# Altium PCB PCB_Toto.PcbDoc
Units mm, origin at the board's own origin, x right, y up, seen from the top; angles counter-clockwise.
Board outline 56.42 x 35 mm, 2 copper layers (Top Layer, Bottom Layer); 14 components, 13 nets, 56 pads, 4 vias.
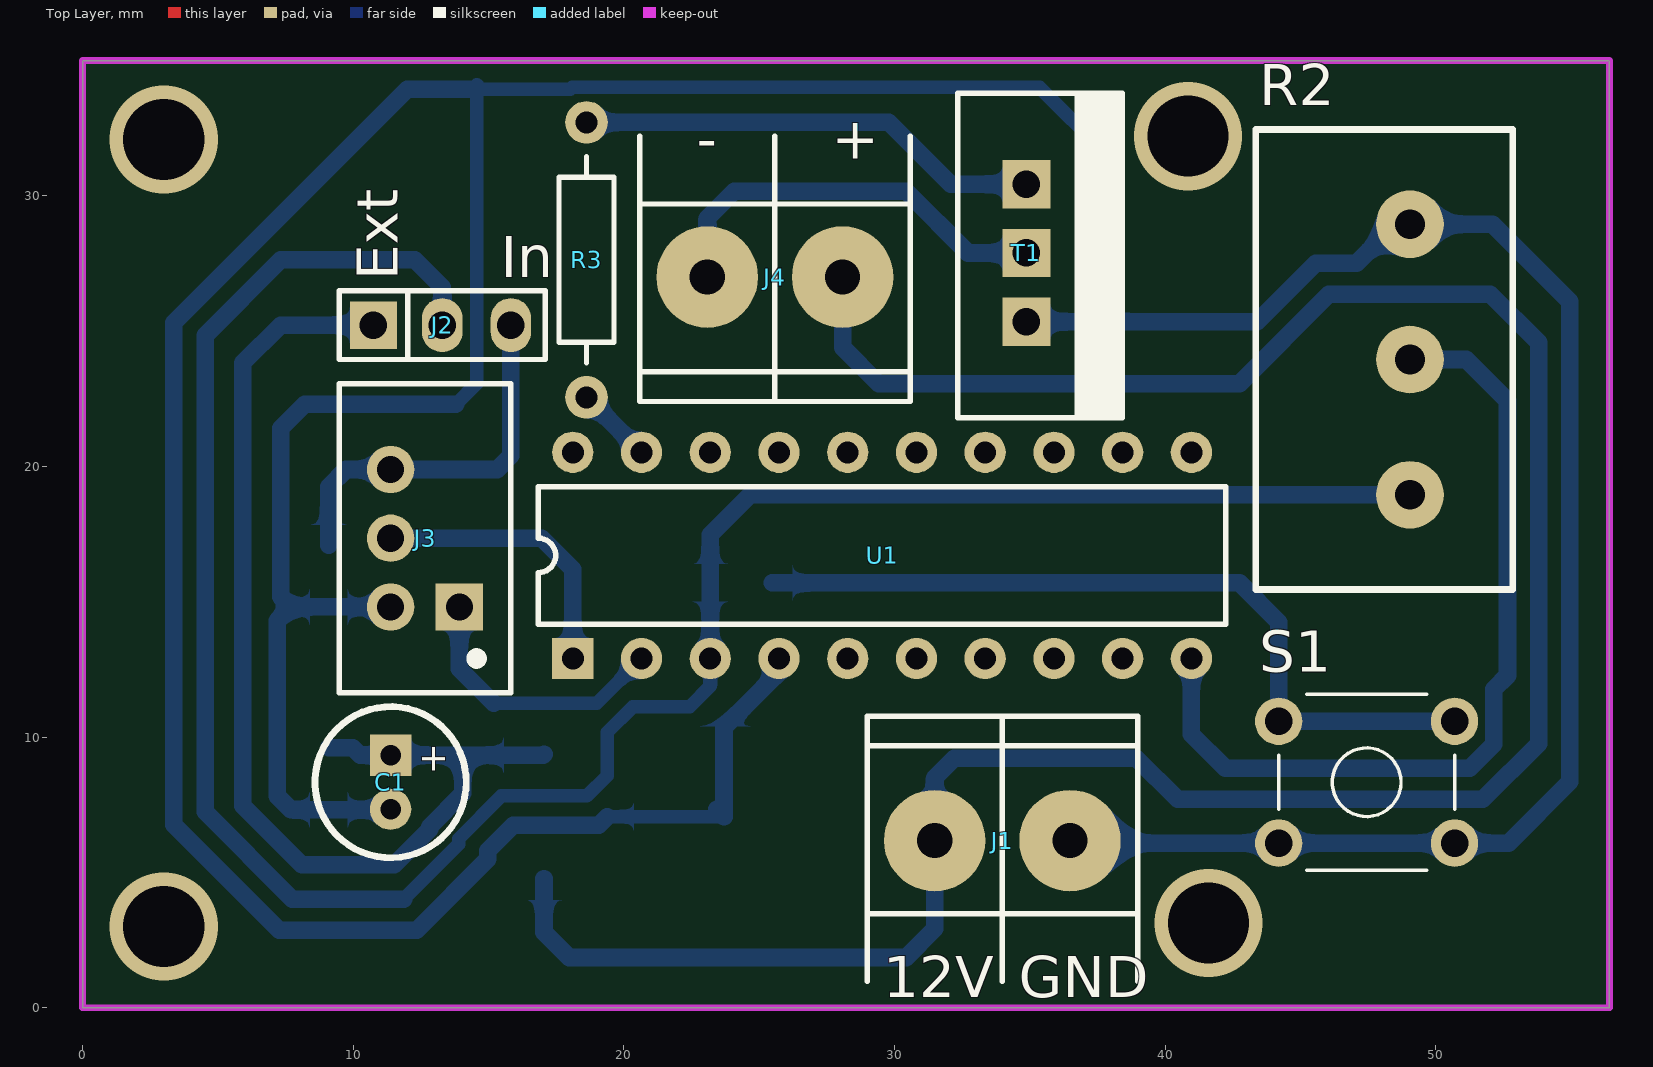
[diagram p0: Top Layer view]
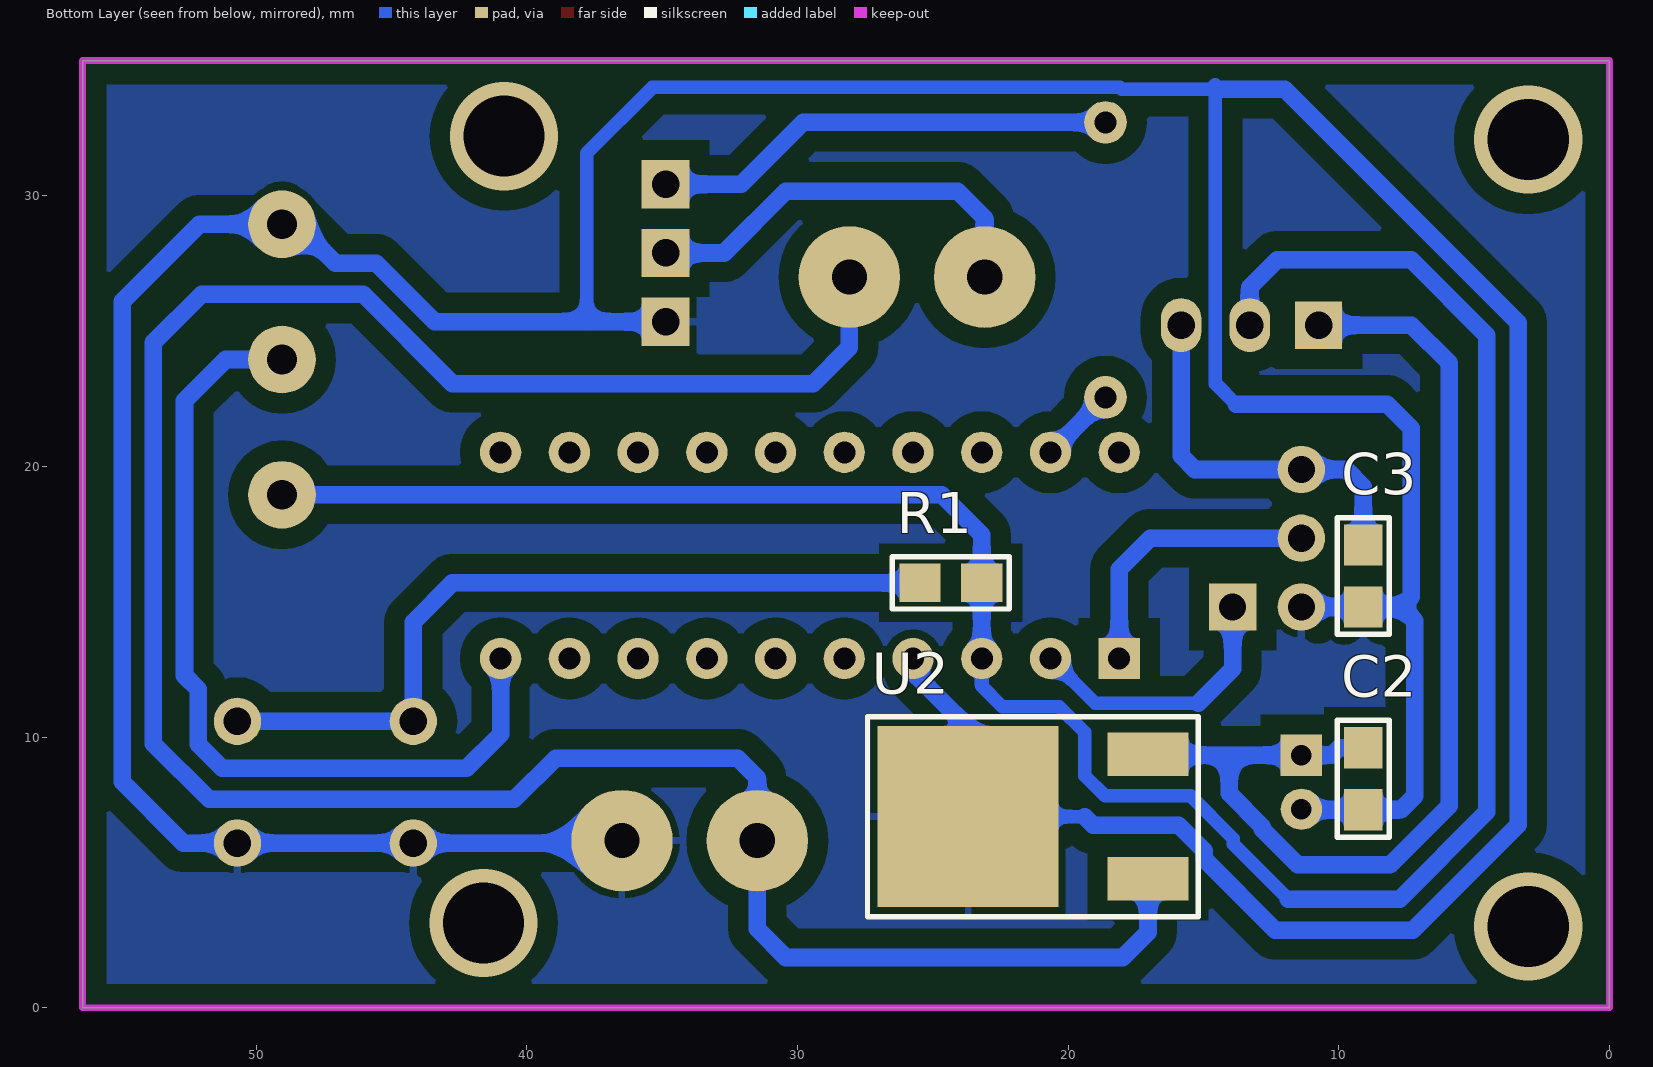
[diagram p1: Bottom Layer view, seen from below]
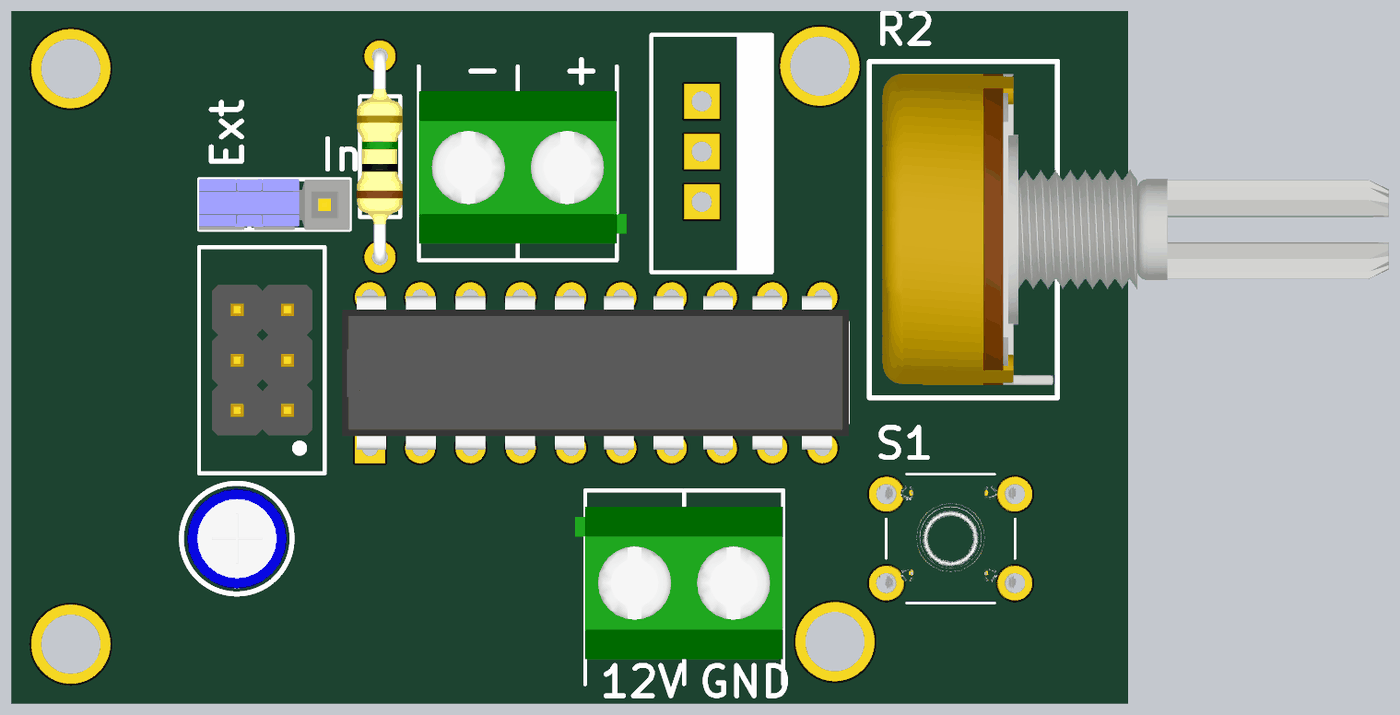
[diagram p2: 3D render of the assembled board from above, using the file's embedded part models]
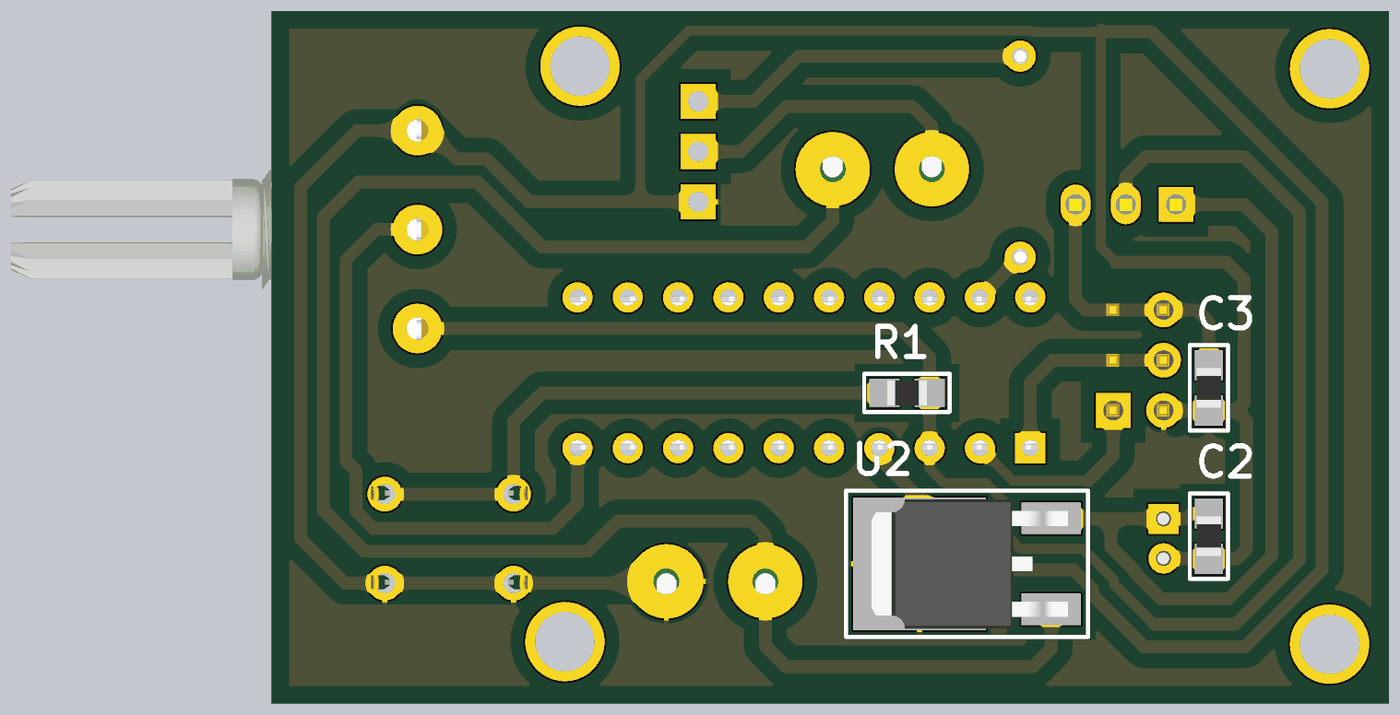
[diagram p3: 3D render of the assembled board from below, using the file's embedded part models]

## Layer stack, top to bottom
Top Solder: solder mask 0.0102, Solder Resist, Dk 3.5
Top Layer: signal copper 0.0356
Dielectric 1: dielectric 0.32, FR-4, Dk 4.8
Bottom Layer: signal copper 0.0356
Bottom Solder: solder mask 0.0102, Solder Resist, Dk 3.5

## Board outline
0,0 56.42,0 56.42,35 0,35

## Design rules (kind name [scope] priority, off if disabled: settings)
Clearance [InPolygon] p1: gap=0.75 ignorepadtopadclearanceinfootprint=FALSE
Clearance Clearance_1 [All] p2: gap=0.254 ignorepadtopadclearanceinfootprint=FALSE except(0: Arc-Hole Track-Hole SMDPad-Hole THPad-Hole Via-Hole Fill-Hole Poly-Hole Region-Hole Text-Hole; 0.5: Arc-Arc Arc-Track Track-Track)
PolygonConnect [All] p1: connectstyle=Relief reliefconductorwidth=0.254 reliefentries=4 polygonreliefangle="90 Angle" airgapwidth=0.254
RoutingVias [All] p1: holewidth=0.711 width=1.27 viastyle="Through Hole" minholewidth=0.711 minwidth=1.27 maxholewidth=0.711 maxwidth=1.27
SolderMaskExpansion [All] p1: expansion=0.102
Width [All] p1: maxlimit=0.8 minlimit=0.5 preferedwidth=0.65
30 further rules are at their usual default settings.

## Components (designator, comment, footprint, x,y, rotation, side; value= is the part's Value field where it differs from the comment)
C1 "10uF" CAP100RP 11.382,8.334 r270 top
C2 "100nF" 0805 9.096,8.461 r270 bottom
C3 "100nF" 0805 9.096,15.954 r270 bottom
J1 "Fuente Externa" BORNERA2 33.988,6.175 r270 top
J2 "JUMPER" JUMPER3 13.287,25.225 r0 top
J3 "CON3*2" SIP3*2 13.922,14.811 r90 top
J4 "BORNERA 2" BORNERA2 25.583,27.003 r90 top
R1 "10K" 0805 24.336,15.7 r180 bottom
R2 "25K" POTENCIOMETRO 49.05,23.955 r90 top
R3 "1K" RES400 18.621,22.558 r90 top
S1 "TACT SWITCH" TACTSWITCH 47.45,8.334 r90 top
T1 "TRANSISTOR NPN" "TO-220 V" 34.877,27.892 r270 top
U1 "MC9S08SH8" DIP20 18.113,12.906 r90 top
U2 "78XX" DPAK 17.051,4.764 r90 bottom

## Footprints (in the part's own frame and the unit in brackets; to place one, negate y for a bottom-side part, rotate by r counter-clockwise, add the part's x,y. Pads: shape width x height; smd on the part's side, far side on the other; paste and mask are expansions set on the pad)
0805 [mil] "Pasivo 0805"
  rect 60x56 smd: 1(-45,0) 2(45,0)
  silkscreen extent -85,-38 85,38, body extent -40,-25 39,25, height 15
BORNERA2 [mm] "Bornera con Tornillos 5mm separación"
  round 3.75 hole 1.3: 1(0,2.5) 2(0,-2.5)
  silkscreen extent -4.6,-5 5.2,5, body extent -3.76,-5.5 3.94,5, height 10
CAP100RP [mil] "Body diameter 5mm"
  rect 60x60 hole 30: 1(-39.37,0)
  round 60 hole 30: 2(39.37,0)
  silkscreen extent -110,-110 110,110, body extent -99,-99 99,100, height 454
DIP20 [mil]
  rect 60x60 hole 32: 1(0,0)
  round 60 hole 32: 2(0,-100) 3(0,-200) 4(0,-300) 5(0,-400) 6(0,-500) 7(0,-600) 8(0,-700) 9(0,-800) 10(0,-900) 11(300,-900) 12(300,-800) 13(300,-700) 14(300,-600) 15(300,-500) 16(300,-400) 17(300,-300) 18(300,-200) 19(300,-100) 20(300,0)
  silkscreen extent 50,-950 250,50, body extent -3,-953 303,55, height 177
DPAK [mm]
  rect 1.6x3 smd: 1(0,0) 3(4.6,0)
  rect 6.7x6.7 smd: 2(2.3,6.65)
  silkscreen extent -1.4,-1.85 6,10.36, body extent -0.98,-0.85 5.56,9.08, height 2.36
JUMPER3 [mm]
  rect 1.75x1.75 hole 1.016: 1(-2.54,0)
  oval 1.5x2 hole 1.016: 2(0,0) 3(2.54,0)
  silkscreen extent -3.81,-1.27 3.81,1.27, body extent -3.81,-1.3 3.81,1.27, height 16.15
POTENCIOMETRO [mm]
  round 2.5 hole 1.1: 1(-5,0) 2(0,0) 3(5,0)
  silkscreen extent -8.5,-3.8 8.5,5.7, body extent -7.87,-20.53 7.87,5.03, height 20.12
RES400 [mil]
  round 62 hole 32: 1(0,0) 2(400,0)
  silkscreen extent 50,-40 350,40, body extent -12,-45 412,46, height 96
SIP3*2 [mm]
  rect 1.75x1.75 hole 1: 1(0,0)
  round 1.75 hole 1: 2(0,2.54) 4(2.54,2.54) 6(5.08,2.54)
  round 0 all layers, no hole: 3(2.54,0) 5(5.08,0)
  silkscreen extent -3.18,-1.91 8.25,4.45, body extent -1.26,-1.3 6.36,3.78, height 10.1
TACTSWITCH [mm]
  round 1.75 hole 1.016: 1(-2.25,-3.25) 2(-2.25,3.25) 3(2.25,-3.25) 4(2.25,3.25)
  silkscreen extent -3.25,-3.25 3.25,3.25, body extent -3.05,-3.95 3.15,3.95, height 7
"TO-220 V" [mil]
  rect 70x70 hole 40: 1(-100,0) 2(0,0) 3(100,0)
  silkscreen extent -232,-100 240,139, body extent -197,-79 197,118, height 709

## Part data
C1: library part CAPPOL
C2 C3: library part CAP
J1: library part "BORNERA 2"
J2: library part JUMPER3
J3: library part PIN3*2
R1 R3: library part RES
R2: library part POTENCIOMETRO
U1: "IC MCU 8BIT 8K FLASH 20-DIP"
U2: "REGULDOR POSITIVO"

## Via types
v1: diameter 4, hole 3, Top Layer to Bottom Layer, 4 vias

## Nets (pads, with @x,y where several pads share a name; then routed paths per layer and width w, separated by ;. In a path a pad name is that pad's centre, name@x,y a point inside that pad or via, vN(x,y) a via of type N, cw(c..) or ccw(c..) an arc to the next point about the centre after c; other vN are vias at no path point)
5V: C1.1 C2.1 J2.1 U2.3 | length 41.4
  Bottom Layer w0.65: C2.1 9.985,9.604 10.255,9.334 C1.1 14.049,9.334 ; J2.1 7.318,25.225 5.921,23.828 5.921,7.47 8.105,5.286 11.509,5.286 12.822,6.599 12.822,6.694 14.049,7.921 14.049,9.334 ; U2.3 17.021,9.334 14.049,9.334
12V: J1.2 J4.2 U2.1 | length 92.7
  Bottom Layer w0.65: U2.1 17.051,2.792 17.986,1.857 30.432,1.857 31.488,2.913 J1.2 31.488,8.501 32.21,9.223 38.941,9.223 40.465,7.699 51.743,7.699 53.807,9.763 53.807,24.583 52.022,26.368 46.053,26.368 42.751,23.066 29.416,23.066 28.083,24.399 J4.2
A4: J3.1 U1.2 | length 10.2
  Bottom Layer w0.5: 15.192,11.255 19.002,11.255 U1.2
  Bottom Layer w0.65: J3.1 13.922,12.525 15.192,11.255
A5: J3.4 U1.1 | length 10.5
  Bottom Layer w0.65: J3.4 16.97,17.351 18.113,16.208 U1.1
BDM: C3.1 J2.3 J3.6 | length 14.2
  Bottom Layer w0.65: C3.1 9.096,19.256 9.731,19.891 J3.6 15.319,19.891 15.827,20.399 J2.3
GND: C1.2 C2.2 C3.2 J1.1 J3.2 R2.3 S1.1 S1.2 T1.3 U1.4 U2.2 | length 196.1
  Bottom Layer w0.5: 13.795,22.304 14.557,23.066 14.557,33.941 ; 14.557,34.115 14.731,33.941 18.018,33.941 18.086,34.009 35.364,34.009 37.798,31.575 37.798,25.352 ; 19.39,7.064 U2.2
  Bottom Layer w0.65: C1.2 11.366,7.318 C2.2 7.699,7.318 7.191,7.826 7.191,14.303 7.699,14.811 ; J3.2 C3.2 7.699,14.811 ; 13.795,22.304 8.207,22.304 7.318,21.415 7.318,15.192 7.699,14.811 ; 14.557,33.941 11.995,33.941 3.374,25.32 3.374,6.764 7.272,2.866 12.342,2.866 14.972,5.496 14.972,5.804 15.919,6.751 19.077,6.751 19.39,7.064 ; U2.2@23.431,7.334 U2.2 23.701,10.366 25.733,12.398 U1.4 ; T1.3 37.798,25.352 43.411,25.352 45.577,27.518 47.076,27.518 48.513,28.955 R2.3 ; J1.1 36.579,6.084 S1.2 S1.1 52.693,6.084 54.957,8.348 54.957,26.1 52.102,28.955 R2.3 ; R2.3@49.05,29.467 R2.3
NetJ4_1: J4.1 T1.2 | length 15.3
  Bottom Layer w0.65: J4.1 23.083,29.179 24.082,30.178 30.432,30.178 32.718,27.892 T1.2
NetR1_1: R1.1 S1.3 S1.4 | length 29.5
  Bottom Layer w0.65: R1.1 42.751,15.7 44.2,14.251 S1.4 S1.3
NetR3_2: R3.2 T1.1 | length 17.2
  Bottom Layer w0.65: R3.2 29.797,32.718 32.083,30.432 T1.1
Pote: R2.2 U1.10 | length 32
  Bottom Layer w0.65: U1.10 40.973,10.112 42.236,8.849 51.267,8.849 52.154,9.736 52.154,11.775 52.657,12.278 52.657,22.431 51.133,23.955 R2.2
Puls: U1.9
Tira: R3.1 U1.19 | length 2.9
  Bottom Layer w0.65: R3.1 U1.19
VDD: J2.2 R1.2 R2.1 U1.3 | length 85.7
  Bottom Layer w0.5: 11.865,4.016 13.897,6.048 13.897,6.249 15.474,7.826 18.632,7.826 19.383,8.577 19.383,10.175 20.336,11.128 22.431,11.128 23.193,11.89 U1.3
  Bottom Layer w0.65: 11.865,4.016 7.748,4.016 4.524,7.24 4.524,24.844 7.318,27.638 12.271,27.638 13.287,26.622 J2.2 ; U1.3 R1.2 23.193,17.478 24.67,18.955 R2.1
pads on no net: J3.3 J3.5 U1.5 U1.6 U1.7 U1.8 U1.11 U1.12 U1.13 U1.14 U1.15 U1.16 U1.17 U1.18 U1.20
copper on no net:
  other v1: 3,3 41.608,3.127 3,32.083 40.846,32.21

## Polygon pours and split planes (outlines as drawn)
GND on Bottom Layer "Bottom Layer-GND" (solid, pour order 2): 0,35 56.42,35 56.42,0 0,0

## Keep-outs
Keep-Out Layer:
  the board outline again, w0.254

## Silkscreen, mask and mechanical layers (free items; w line width, h text height)
Top Overlay:
  text "-" at 22.686,31.369 h1.52
  text "+" at 27.686,31.369 h1.52
  text "12V" at 29.591,0.381 h1.52
  text "GND" at 34.591,0.381 h1.52

## Text inside footprints (layer, text, board x,y; h text height)
C1: Top Overlay "+" at 12.55,9.782 h1.02 r270
J2: Top Overlay "In" at 15.446,27.003 h1.52; Top Overlay "Ext" at 11.636,26.876 h1.52 r90